# EAGLE board plate (EAGLE 9.6.2), part 1 of 6
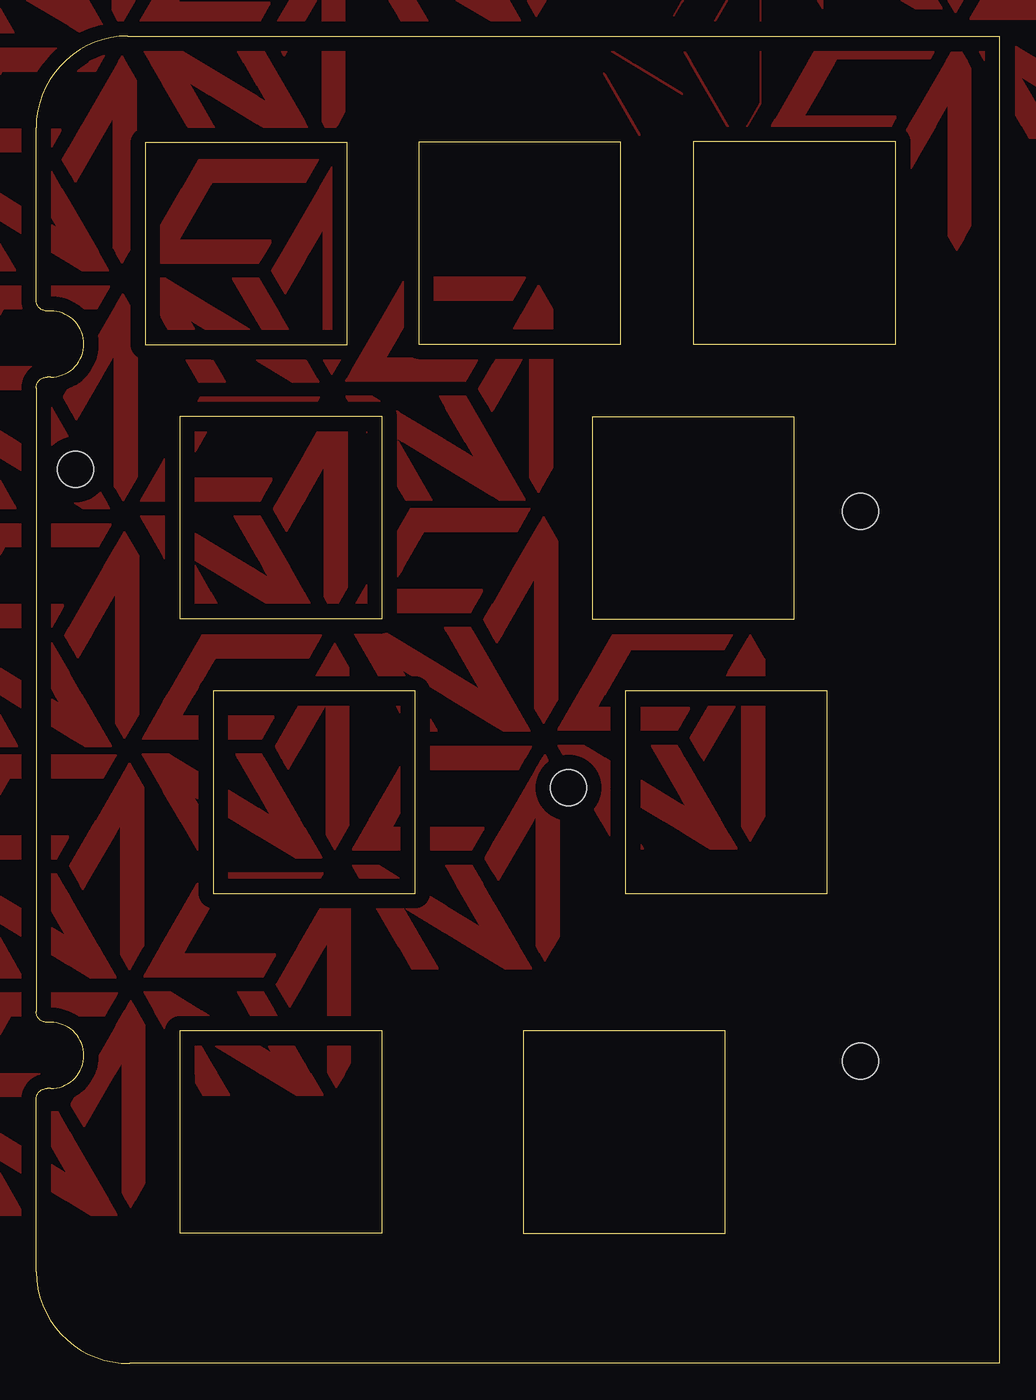
[diagram p0: board, top side]
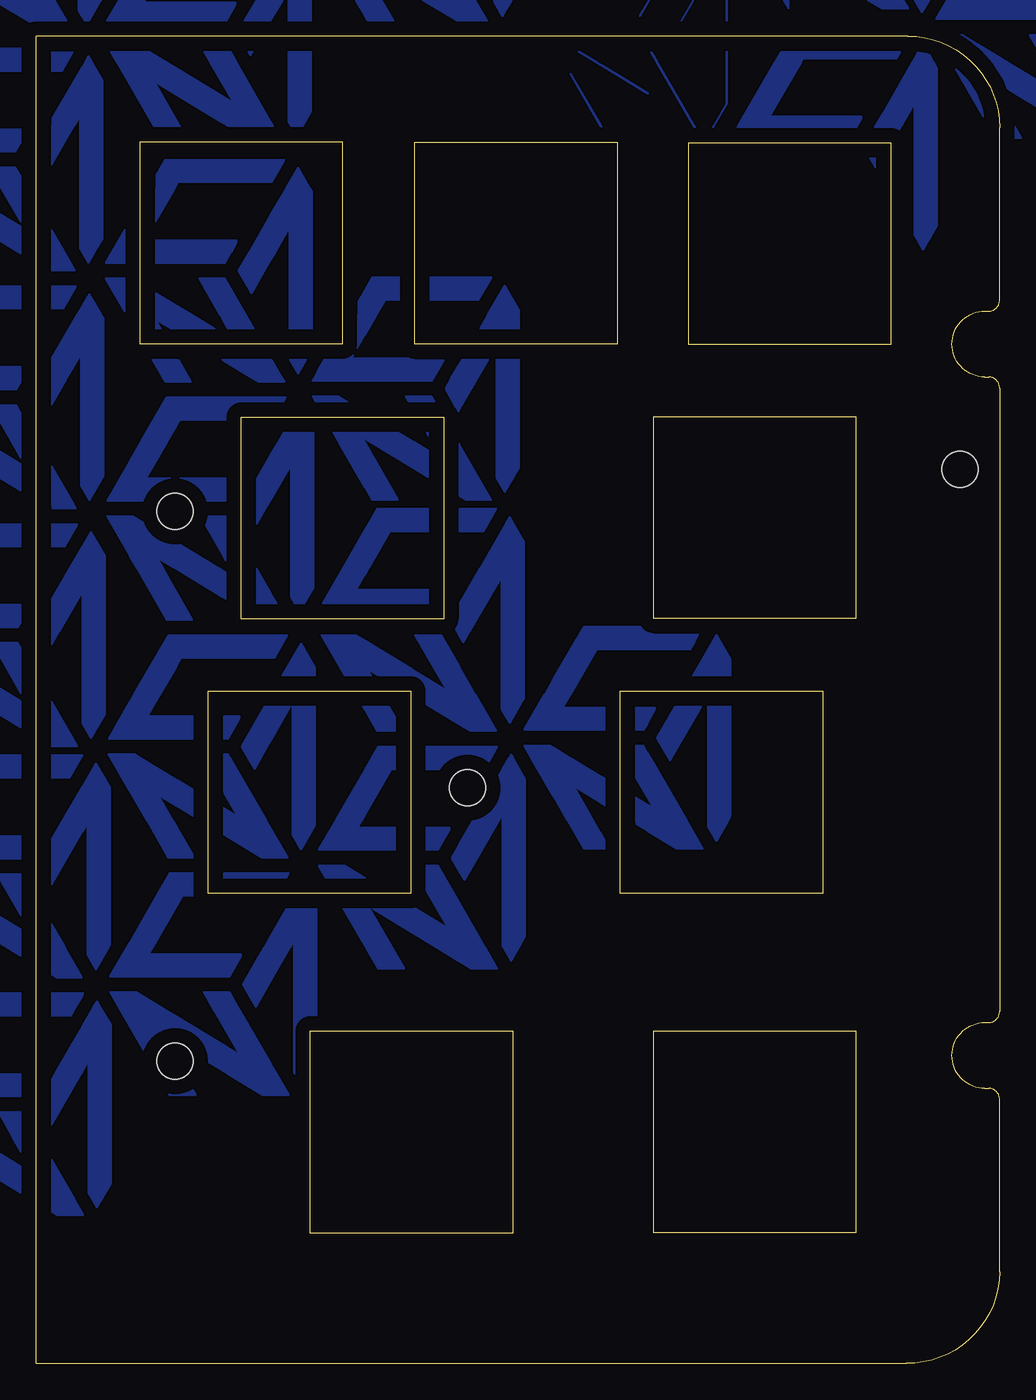
[diagram p1: board, bottom side, seen from below]

Size 66.73 x 91.95 mm. Coordinates in mm from the lower left corner, seen from the top.
Outline: 6.35,91.95 arc90 0,85.6 0,73.66 arc90 0.76,72.9 1.02,72.9 arc-90 3.3,70.61 arc-90 1.02,68.33 0.76,68.33 arc90 0,67.56 0,24.38 arc90 0.76,23.62 1.02,23.62 arc-90 3.3,21.34 arc-90 1.02,19.05 0.76,19.05 arc90 0,18.29 0,6.35 arc90 6.48,0 66.73,0 66.73,91.95 6.35,91.95
Outline: 7.54,84.57 7.54,70.57 21.54,70.57 21.54,84.57 7.54,84.57
Outline: 26.49,84.59 26.49,70.59 40.49,70.59 40.49,84.59 26.49,84.59
Outline: 45.52,84.62 45.52,70.62 59.52,70.62 59.52,84.62 45.52,84.62
Outline: 9.96,65.59 9.96,51.59 23.96,51.59 23.96,65.59 9.96,65.59
Outline: 38.51,65.57 38.51,51.57 52.51,51.57 52.51,65.57 38.51,65.57
Outline: 12.27,46.57 12.27,32.57 26.27,32.57 26.27,46.57 12.27,46.57
Outline: 40.79,46.57 40.79,32.57 54.79,32.57 54.79,46.57 40.79,46.57
Outline: 9.96,23.05 9.96,9.05 23.96,9.05 23.96,23.05 9.96,23.05
Outline: 33.73,23.02 33.73,9.02 47.73,9.02 47.73,23.02 33.73,23.02
Copper layers (1*16): Top 0.035mm / dielectric 1.5mm / Bottom 0.035mm
Design rules "default": minimum track width 6mil, minimum drill 0.35mm, track to track 6mil, track to pad 6mil, pad to pad 6mil, via to via 6mil, smd to smd 6mil, copper to edge 40mil, drill to drill 6mil, minimum pad ring 10mil, minimum via ring 8mil, stop-mask expansion 4mil, vias tented up to drill 0mil, thermal gap 10mil
Holes 2.5 mm at 36.86,39.88 57.1,59.03 57.1,20.93 2.74,61.95

## Placement (x,y rotation side)

## Tracks (layer width: path | path; a pad name or v marks a point on that pad's centre or on a via)
GND
  pour Top (rank 3): 63.67,107.92 63.52,107.66 63.52,107.64 63.81,107.64 63.81,107.66
  pour Top (rank 3): 77.39,19.73 77.29,19.89 77.29,19.89 77.29,19.74 77.31,19.73
  pour Top (rank 3): 77.39,35.15 77.31,35.15 77.29,35.14 77.29,34.98 77.29,34.98
  pour Top (rank 3): 77.73,3.71 77.3,4.47 77.29,4.48 77.29,3.71 77.31,3.71
  pour Top (rank 3): 77.74,19.12 77.31,19.12 77.29,19.12 77.29,18.35 77.3,18.36
  pour Top (rank 3): 77.29,1.72 77.82,2.65 77.8,2.65 77.29,2.65 77.29,2.63
  pour Top (rank 3): 64.65,106.21 64.25,106.9 64.24,106.9 64.24,103.28 64.26,103.26 64.63,103.26 64.65,103.27
  pour Top (rank 3): 63.51,107.64 60.99,103.28 60.99,103.26 62.8,103.26 62.82,103.28 63.06,103.7 63.07,103.71 63.07,103.28 63.08,103.26 64.23,103.26 64.24,103.27 64.24,106.9 64.24,106.92 63.83,107.64 63.8,107.64
  pour Top (rank 3): 62.81,103.26 61,103.26 60.98,103.25 60.98,100.1
  pour Top (rank 3): 60.14,99.68 60.43,99.17 60.44,99.17 60.98,100.09 60.98,100.12 60.98,103.24 60.98,103.26 59.52,100.74
  pour Top (rank 3): 64.24,103.26 63.07,103.26 63.07,103.24 63.07,98.9 63.08,98.89 64.23,98.89 64.24,98.9
  pour Top (rank 3): 64.65,103.26 64.25,103.26 64.24,103.25 64.24,98.9 64.26,98.89 64.63,98.89 64.65,98.89
  pour Top (rank 3): 63.67,93.58 64.2,94.5 64.18,94.51 63.14,94.51 63.13,94.5 63.65,93.59
  pour Top (rank 3): 60.98,103.26 60.98,103.27 60.98,103.27
  pour Top (rank 3): 64.65,95.28 64.65,98.88 64.63,98.89 64.26,98.89 64.24,98.87 64.24,94.58 64.25,94.59
  pour Top (rank 3): 63.13,94.51 64.19,94.51 64.21,94.52 64.24,94.56 64.24,94.59 64.24,98.88 64.22,98.89 63.07,98.89 63.07,98.86 63.07,94.62 63.07,94.6
  pour Top (rank 3): 64.24,77.95 64.74,78.8 64.74,78.83 64.74,81.36 64.72,81.37 64.26,81.37 64.24,81.36
  pour Top (rank 3): 63.15,81.37 63.15,78.14 63.16,78.12 63.75,77.1 63.77,77.12 64.23,77.93 64.24,77.95 64.24,81.36 64.22,81.37
  pour Top (rank 3): 64.24,85.75 63.18,85.75 63.15,85.74 63.15,81.37 64.22,81.37 64.24,81.37
  pour Top (rank 3): 62.29,85.75 60.98,85.75 60.98,83.48
  pour Top (rank 3): 60.23,83.21 60.52,82.7 60.53,82.7 60.97,83.46 60.98,83.48 60.98,85.73 60.98,85.75 60.47,85.75 60.45,85.73 59.61,84.27
  pour Top (rank 3): 60.98,86.65 60.48,85.77 60.47,85.75 60.97,85.75 60.98,85.76
  pour Top (rank 3): 60.98,85.75 62.29,85.75 62.3,85.77 63.14,87.22 63.15,87.23 63.15,85.77 63.16,85.75 64.23,85.75 64.24,85.76 64.24,90.11 64.24,90.13 63.01,90.13 62.99,90.12 60.99,86.65 60.98,86.63
  pour Top (rank 3): 64.24,81.37 64.72,81.37 64.74,81.38 64.74,85.75 64.26,85.75 64.24,85.74
  pour Top (rank 3): 64.51,90.13 64.25,90.59 64.24,90.57 64.24,90.15 64.25,90.13
  pour Top (rank 3): 64.24,85.75 64.72,85.75 64.74,85.76 64.74,89.71 64.74,89.74 64.52,90.11 64.51,90.13 64.24,90.12
  pour Top (rank 3): 64.24,90.59 63.76,91.42 63.75,91.44 63,90.14 63,90.13 64.23,90.13 64.24,90.14
  pour Top (rank 3): 54.46,91.82 53.49,90.14 53.49,90.13 54.45,90.13 54.46,90.14
  pour Top (rank 3): 55.31,90.13 55.45,90.38 55.47,90.4 57.71,90.4 57.72,90.41 57.72,91.96 57.72,91.98 54.57,91.98 54.55,91.98 54.47,91.84 54.46,91.81 54.46,90.13 54.48,90.13
  pour Top (rank 3): 51.2,85.75 54.45,85.75 54.46,85.77 54.46,86.38 54.44,86.38 53.16,86.38 53.15,86.4 54.46,88.66 54.46,90.12 54.44,90.13 53.5,90.13 53.48,90.12 51.21,86.2 51.2,86.17
  pour Top (rank 3): 51.22,84.8 54.44,84.8 54.46,84.81 54.46,85.74 54.44,85.75 51.22,85.75 51.2,85.74 51.2,84.81
  pour Top (rank 3): 51.2,84.8 51.2,85.73 51.19,85.75 50.95,85.75 50.41,84.8 50.43,84.8
  pour Top (rank 3): 54.49,84.8 57.71,84.8 57.72,84.81 57.72,85.74 57.7,85.75 54.48,85.75 54.46,85.73 54.46,84.8
  pour Top (rank 3): 60.98,91.98 57.73,91.98 57.72,91.96 57.72,90.41 57.74,90.4 60.97,90.4 60.98,90.4
  pour Top (rank 3): 57.72,84.8 58.68,84.8 58.7,84.81 59.24,85.73 59.23,85.75 57.74,85.75 57.72,85.73
  pour Top (rank 3): 59.24,85.75 59.51,86.21 59.52,86.23 59.52,86.37 59.51,86.38 57.72,86.38 57.72,86.36 57.72,85.75
  pour Top (rank 3): 57.72,86.38 54.46,86.38 54.46,86.36 54.46,85.75 57.72,85.75 57.72,85.77
  pour Top (rank 3): 54.46,90.13 54.46,88.68 54.46,88.66 55.3,90.12 55.29,90.13
  pour Top (rank 3): 51.2,86.18 50.96,85.76 50.96,85.75 51.18,85.75 51.2,85.75
  pour Top (rank 3): 61.93,90.4 62.83,91.97 62.83,91.98 60.99,91.98 60.98,91.96 60.98,90.41 60.99,90.4
  pour Top (rank 3): 69.64,90.13 67.52,91.41 67.5,91.4 67.5,90.13
  pour Top (rank 3): 66.46,92.05 64.65,92.05 64.64,92.04 65.73,90.15 65.75,90.13 67.48,90.13 67.5,90.13 67.5,91.41 67.49,91.43 66.48,92.03
  pour Top (rank 3): 67.5,87.08 68.26,85.76 68.28,85.75 70.1,85.75 70.09,85.77 68.12,89.18 68.12,89.19 70.76,87.59 70.76,89.43 70.75,89.45 69.66,90.11 69.63,90.13 67.52,90.13 67.5,90.12
  pour Top (rank 3): 70.76,89.44 70.76,87.6 70.78,87.58 73.79,85.76 73.81,85.75 74,85.75 74.03,85.75 74.03,90.13 72.24,90.13 72.22,90.12 73.59,87.74 73.6,87.73
  pour Top (rank 3): 67.5,90.13 65.77,90.13 65.75,90.12 67.49,87.1 67.5,87.08
  pour Top (rank 3): 74.03,85.75 76.56,85.75 76.55,85.77 74.04,90.11 74.03,90.12
  pour Top (rank 3): 74.03,90.13 74.03,90.13 74.03,90.14
  pour Top (rank 3): 73.04,91.86 72.93,92.04 72.91,92.05 71.12,92.05 71.11,92.04 72.21,90.13 72.24,90.13 74.02,90.13 74.02,90.15
  pour Top (rank 3): 74.03,85.62 75.23,84.88 75.25,84.87 77.07,84.87 76.56,85.75 74.03,85.75 74.03,85.72
  pour Top (rank 3): 68.78,84.87 70.59,84.87 70.6,84.88 70.11,85.73 70.09,85.75 68.27,85.75 68.29,85.72
  pour Top (rank 3): 73.81,85.75 74.02,85.62 74.03,85.64 74.03,85.74 74,85.75
  pour Top (rank 3): 67.5,94.51 70.76,94.51 70.76,94.53 70.76,94.69 67.51,94.69 67.5,94.67
  pour Top (rank 3): 73.73,94.51 73.75,94.53 73.75,94.69 70.79,94.69 70.76,94.69 70.76,94.53 70.77,94.51
  pour Top (rank 3): 64.65,93.11 67.5,93.11 67.5,93.13 67.5,94.49 67.49,94.51 65.47,94.51 65.44,94.5 64.64,93.12
  pour Top (rank 3): 67.5,94.91 69.69,98.7 69.71,98.7 70.75,98.7 70.76,98.72 70.76,98.88 70.75,98.89 67.98,98.89 67.96,98.87 67.51,98.08 67.5,98.06
  pour Top (rank 3): 74.03,98.7 76.15,98.7 76.17,98.72 76.26,98.88 74.03,98.89 74.03,98.86
  pour Top (rank 3): 76.26,98.89 77.06,100.27 77.06,100.29 74.04,100.29 74.03,100.28 74.03,98.89 74.05,98.89
  pour Top (rank 3): 67.5,93.11 70.75,93.11 70.76,93.12 70.76,94.51 67.52,94.51 67.5,94.49
  pour Top (rank 3): 70.76,100.29 68.79,100.29 68.77,100.27 67.98,98.91 67.97,98.89 70.75,98.89 70.76,98.9
  pour Top (rank 3): 70.76,98.89 74.01,98.89 74.03,98.9 74.03,100.29 70.78,100.29 70.76,100.27
  pour Top (rank 3): 70.76,93.11 72.9,93.11 72.93,93.11 73.73,94.5 73.72,94.51 70.78,94.51 70.76,94.49
  pour Top (rank 3): 67.5,94.69 67.4,94.69 67.38,94.69 67.5,94.9 67.5,94.93 67.5,98.07 67.49,98.06 65.45,94.52 65.45,94.51 67.5,94.51 67.5,94.53
  pour Top (rank 3): 70.76,98.7 74.02,98.7 74.03,98.72 74.03,98.89 70.77,98.89 70.76,98.86
  pour Top (rank 3): -2.16,76.99 -3.91,80.01 -3.9,80.02 -0.99,78.25 -0.97,78.25 -0.97,80.09 -0.99,80.11 -3.07,81.36 -3.09,81.37 -4.21,81.37 -4.23,81.36 -4.23,77.41 -4.22,77.39 -4,77 -3.98,76.99
  pour Top (rank 3): 1.01,82.68 0.9,82.87 0.88,82.87 -0.91,82.87 -0.92,82.86 -0.06,81.39 -0.05,81.37 1.77,81.37 1.76,81.39
  pour Top (rank 3): 1.1,76.99 2.28,76.27 2.29,76.29 2.29,76.98 2.27,76.99
  pour Top (rank 3): 2.29,76.99 2.29,80.45 2.28,80.48 1.77,81.36 1.75,81.37 -0.03,81.37 -0.05,81.36 1.57,78.56 1.57,78.56 -0.97,80.09 -0.97,80.07 -0.97,78.26 -0.96,78.24 1.09,76.99 1.12,76.99
  pour Top (rank 3): -3.08,81.37 -4.22,82.06 -4.23,82.05 -4.23,81.39 -4.23,81.37
  pour Top (rank 3): -7.39,82.87 -6.52,81.37 -6.5,81.37 -4.26,81.37 -4.23,81.37 -4.23,82.06 -4.25,82.08 -5.55,82.87 -5.58,82.87
  pour Top (rank 3): -6.52,81.37 -4.24,77.42 -4.23,77.41 -4.23,81.36 -4.25,81.37
  pour Top (rank 3): -3.25,75.69 -1.43,75.69 -1.42,75.71 -2.16,76.98 -2.18,76.99 -3.99,76.99 -3.98,76.97
  pour Top (rank 3): 3.22,75.69 5.03,75.69 5.03,75.71 4.3,76.98 4.28,76.99 2.31,76.99 2.29,76.98 2.29,76.29 2.29,76.26 3.2,75.71
  pour Top (rank 3): 2.29,80.47 2.29,77 2.31,76.99 4.28,76.99 4.29,77
  pour Top (rank 3): 6.94,85.75 6.94,88.87 6.22,90.11 6.2,90.13 5.7,90.13 5.55,89.87 5.55,85.77 5.56,85.75
  pour Top (rank 3): 5.96,90.57 5.7,90.13 5.71,90.13 6.19,90.13 6.21,90.13
  pour Top (rank 3): 2.43,82.34 2.72,81.83 2.74,81.83 4.99,85.73 4.99,85.75 3.17,85.75 3.16,85.72 2.29,84.22 2.29,82.59 2.3,82.57
  pour Top (rank 3): 5.96,76.23 6.38,76.97 6.39,76.99 5.56,76.99 5.55,76.97 5.55,76.94 5.56,76.92 5.94,76.25
  pour Top (rank 3): 6.94,85.75 5.56,85.75 5.55,85.73 5.55,81.38 5.56,81.37 6.92,81.37 6.94,81.37
  pour Top (rank 3): 6.94,81.37 5.56,81.37 5.55,81.35 5.55,77 5.56,76.99 6.39,76.99 6.4,77.01 6.94,77.93 6.94,77.96
  pour Top (rank 3): 1.81,83.4 2.28,82.59 2.29,82.59 2.29,84.21 2.28,84.21
  pour Top (rank 3): 5.55,85.75 5.36,85.75 5.36,85.73 5.36,81.38 5.37,81.37 5.53,81.37 5.55,81.38
  pour Top (rank 3): 5.52,76.99 5.54,76.94 5.55,76.94 5.55,76.97 5.54,76.99
  pour Top (rank 3): 5.55,81.37 5.36,81.37 5.36,81.35 5.36,77.27 5.37,77.25 5.51,76.99 5.54,76.99 5.55,77
  pour Top (rank 3): 5.55,89.87 3.18,85.77 3.17,85.75 4.98,85.75 5,85.76 5.35,86.36 5.36,86.36 5.36,85.77 5.36,85.75 5.55,85.75 5.55,85.77
  pour Top (rank 3): 2.29,90.13 -0.96,90.13 -0.97,90.11 -0.97,89.53 2.28,89.53 2.29,89.54
  pour Top (rank 3): -0.95,83.93 0.89,83.93 0.91,83.94 1.72,85.35 1.72,85.51 -0.97,85.51 -0.97,83.94
  pour Top (rank 3): -6.34,85.75 -7.38,83.95 -7.38,83.93 -4.24,83.93 -4.23,83.95 -4.23,85.5 -4.24,85.51 -4.64,85.51 -4.64,85.53 -4.52,85.74 -4.53,85.75
  pour Top (rank 3): -4.23,86.24 -4.23,89.38 -4.24,89.4 -6.34,85.75 -6.32,85.75 -4.53,85.75 -4.51,85.75
  pour Top (rank 3): -0.99,91.11 -3.24,91.11 -3.25,91.1 -3.8,90.15 -3.81,90.13 -0.98,90.13 -0.97,90.14 -0.97,91.1
  pour Top (rank 3): 2.29,91.11 -0.97,91.11 -0.97,91.09 -0.97,90.13 2.29,90.13 2.29,90.15
  pour Top (rank 3): -0.97,85.51 -4.23,85.51 -4.23,85.49 -4.23,83.94 -4.22,83.93 -0.99,83.93 -0.97,83.94
  pour Top (rank 3): 4.48,90.13 2.29,90.13 2.29,90.1 2.29,89.55 2.3,89.53 4.1,89.53 4.13,89.53
  pour Top (rank 3): -2.33,89.53 -0.98,89.53 -0.97,89.55 -0.97,90.11 -0.98,90.13 -3.8,90.13 -3.82,90.11 -4.22,89.42 -4.23,89.4 -4.23,86.25 -4.23,86.25
  pour Top (rank 3): 5.04,91.11 2.3,91.11 2.29,91.09 2.29,90.13 2.31,90.13 4.47,90.13 4.49,90.14
  pour Top (rank 3): 2.29,96.76 2.29,94.52 2.3,94.51 3.58,94.51 3.58,94.52
  pour Top (rank 3): -1.02,99.35 -0.98,99.28 -0.97,99.26 -0.97,99.35 -1,99.35
  pour Top (rank 3): -7.49,99.35 -7.23,98.89 -4.9,98.89 -5.65,99.34 -5.68,99.35
  pour Top (rank 3): -0.73,94.51 2.28,92.68 2.29,92.7 2.29,94.48 2.28,94.51
  pour Top (rank 3): -4.23,98.48 -4.89,98.88 -4.92,98.89 -7.21,98.89 -7.22,98.88 -4.7,94.52 -4.68,94.51 -4.25,94.51 -4.23,94.51
  pour Top (rank 3): -3.12,92.17 -1.52,92.17 -2.87,94.51 -4.23,94.51 -4.23,94.48 -4.23,93.71 -4.22,93.68 -3.35,92.18 -3.33,92.17
  pour Top (rank 3): -0.73,94.51 2.29,94.51 2.29,94.53 2.29,96.74 2.29,96.77 1.07,98.87 1.05,98.89 -0.74,98.89 -0.75,98.88 1.46,95.04 1.47,95.03 -0.95,96.49 -0.97,96.5 -0.97,94.66 -0.96,94.64
  pour Top (rank 3): 1.06,98.89 0.8,99.35 -0.96,99.35 -0.97,99.33 -0.97,99.28 -0.97,99.25 -0.77,98.9 -0.75,98.89
  pour Top (rank 3): -4.7,94.51 -4.24,93.72 -4.23,93.71 -4.23,94.49 -4.24,94.51
  pour Top (rank 3): -0.97,94.65 -0.97,96.49 -0.99,96.51 -4.23,98.48 -4.23,98.46 -4.23,94.51 -4.21,94.51 -2.88,94.51 -2.88,94.52 -4.01,96.49 -4.01,96.49
  pour Top (rank 3): 3.12,92.17 4.94,92.17 4.93,92.19 3.6,94.5 3.57,94.51 2.29,94.51 2.29,92.69 2.3,92.67 3.1,92.19
  pour Top (rank 3): 5.55,98.89 6.83,98.89 6.84,98.9 6.84,103.25 6.83,103.26 5.57,103.26 5.55,103.26
  pour Top (rank 3): 5.85,92.71 5.87,92.73 6.83,94.39 6.84,94.42 6.84,94.5 6.82,94.51 5.57,94.51 5.55,94.5 5.55,93.24 5.56,93.22
  pour Top (rank 3): 5.55,93.23 5.55,94.51 5.26,94.51 5.26,93.74
  pour Top (rank 3): 6.84,103.26 6.84,105.32 6.84,105.34 5.86,107.03 5.85,107.04 5.56,106.53 5.55,106.51 5.55,103.28 5.56,103.26
  pour Top (rank 3): 2.33,98.81 2.62,98.3 2.63,98.3 2.97,98.88 2.95,98.89 2.31,98.89 2.29,98.88 2.3,98.86
  pour Top (rank 3): 2.28,98.89 2.29,98.88 2.29,98.88
  pour Top (rank 3): 2.29,98.89 2.96,98.89 2.98,98.9 5.24,102.82 5.26,102.84 5.26,98.89 5.27,98.89 5.54,98.89 5.55,98.9 5.55,103.25 5.54,103.26 3.67,103.26 2.3,100.88 2.29,100.86
  pour Top (rank 3): 5.55,106.52 3.67,103.27 3.69,103.26 5.53,103.26 5.55,103.27
  pour Top (rank 3): 6.84,98.89 5.56,98.89 5.55,98.87 5.55,94.52 5.56,94.51 6.82,94.51 6.84,94.51
  pour Top (rank 3): 2.29,100.87 1.72,99.88 1.72,99.86 2.28,98.89 2.29,98.9
  pour Top (rank 3): 5.55,98.89 5.26,98.88 5.26,94.51 5.55,94.51
  pour Top (rank 3): 10.45,85.75 11.19,84.47 11.21,84.46 12.06,84.46 12.07,84.48 12.07,85.73 12.06,85.75
  pour Top (rank 3): 8.81,91.64 7.07,91.64 7.05,91.64 7.92,90.13 7.95,90.13 8.8,90.13 8.81,90.14
  pour Top (rank 3): 16.22,90.13 15.35,91.63 15.33,91.64 15.33,90.15 15.34,90.13
  pour Top (rank 3): 15.33,91.64 13.54,91.64 13.53,91.64 14.39,90.13 14.42,90.13 15.32,90.13 15.33,90.14
  pour Top (rank 3): 15.33,90.13 14.4,90.13 14.41,90.1 15.33,88.51 15.33,88.53
  pour Top (rank 3): 11.38,90.13 8.89,91.63 8.87,91.64 8.81,91.64 8.81,91.62 8.81,90.15 8.82,90.13
  pour Top (rank 3): 15.33,87.73 12.07,89.71 12.07,87.87 12.08,87.85 15.32,85.89 15.33,85.89
  pour Top (rank 3): 12.07,85.75 12.07,86.09 12.07,86.12 10.54,88.77 10.53,88.78 12.06,87.86 12.07,87.87 12.07,89.68 12.07,89.71 11.38,90.12 11.36,90.13 8.83,90.13 8.81,90.11 8.81,88.59 10.45,85.75 10.47,85.75
  pour Top (rank 3): 8.81,90.13 7.93,90.13 7.94,90.11 8.8,88.61 8.81,88.61
  pour Top (rank 3): 18.59,84.46 19.47,84.46 19.48,84.47 18.75,85.74 18.72,85.75 18.61,85.75 18.59,85.74
  pour Top (rank 3): 17.67,84.46 18.57,84.46 18.59,84.47 18.59,85.75 15.56,85.75 15.57,85.73 17.65,84.48
  pour Top (rank 3): 18.74,85.75 18.6,86 18.59,85.99 18.59,85.75 18.61,85.75
  pour Top (rank 3): 15.33,88.51 16.01,87.33 16.01,87.32 15.35,87.72 15.33,87.72 15.33,85.88 15.35,85.87 15.54,85.76 15.56,85.75 18.57,85.75 18.59,85.75 18.59,85.99 18.59,86.02 16.22,90.13 15.34,90.13 15.33,90.1
  pour Top (rank 3): 12.07,86.11 12.07,85.77 12.07,85.75 12.26,85.75 12.28,85.75
  pour Top (rank 3): 12.28,85.75 12.07,85.75 12.07,84.47 12.09,84.46 13.02,84.46 13.02,84.48
  pour Top (rank 3): 18.59,94.51 18.59,96.21 17.61,94.51
  pour Top (rank 3): 20.4,99.34 20.14,98.9 20.14,98.89 20.65,98.89 20.65,98.9
  pour Top (rank 3): 16.26,92.17 17.16,90.6 17.18,90.59 18.59,93.04 18.59,94.48 18.59,94.51 17.63,94.51 17.61,94.5
  pour Top (rank 3): 20.4,85 20.83,85.74 20.81,85.75 19.98,85.75 19.97,85.74 20.39,85.02
  pour Top (rank 3): 21.39,94.51 19.81,94.51 19.8,94.49 19.8,90.14 19.82,90.13 21.36,90.13 21.39,90.13
  pour Top (rank 3): 19.44,94.51 18.61,94.51 18.59,94.5 18.59,93.06 18.6,93.05
  pour Top (rank 3): 19.96,85.75 20.82,85.75 20.84,85.76 21.38,86.7 21.39,86.73 21.39,90.11 21.37,90.13 19.8,90.13 19.8,86.05 19.8,86.02
  pour Top (rank 3): 19.8,98.3 18.6,96.23 18.59,96.2 18.59,94.52 18.6,94.51 19.43,94.51 19.45,94.52 19.79,95.12 19.8,95.12 19.8,94.51 19.82,94.51 21.37,94.51 21.39,94.52 21.39,97.61 21.38,97.63 20.66,98.88 20.64,98.89 20.16,98.89 20.13,98.88
  pour Top (rank 3): 15.45,92.89 16.16,94.11 16.17,94.14 16.17,94.27 16.15,94.28 15.35,94.28 15.33,94.27 15.33,92.7 15.35,92.71
  pour Top (rank 3): 8.83,92.7 12.06,92.7 12.07,92.71 12.07,94.26 12.07,94.28 9.8,94.28 9.8,94.3 9.92,94.51 8.83,94.51 8.81,94.5 8.81,92.71
  pour Top (rank 3): 18.92,98.89 19.49,99.88 18.61,99.88 18.59,99.87 18.59,98.91 18.6,98.89
  pour Top (rank 3): 18.57,98.29 18.59,98.31 18.59,98.34 18.59,98.87 18.58,98.89 15.36,98.89 15.33,98.88 15.33,98.3 15.35,98.29
  pour Top (rank 3): 18.59,99.88 15.34,99.88 15.33,99.86 15.33,98.9 15.35,98.89 18.57,98.89 18.59,98.89
  pour Top (rank 3): 12.07,99.88 11.22,99.88 11.19,99.87 10.63,98.9 10.63,98.89 12.05,98.89 12.07,98.89
  pour Top (rank 3): 12.08,92.7 15.33,92.7 15.33,94.27 15.31,94.28 12.08,94.28 12.07,94.27 12.07,92.72
  pour Top (rank 3): 8.81,92.7 8.81,94.48 8.81,94.51 8.11,94.51 8.09,94.5 7.05,92.7
  pour Top (rank 3): 18.59,98.32 18.92,98.88 18.89,98.89 18.6,98.89 18.59,98.86
  pour Top (rank 3): 15.33,98.89 15.33,99.87 15.31,99.88 12.08,99.88 12.07,99.86 12.07,98.9 12.08,98.89
  pour Top (rank 3): 8.81,94.51 9.9,94.51 9.93,94.51 12.06,98.21 12.07,98.23 12.07,98.87 12.06,98.89 10.64,98.89 10.62,98.88 8.82,95.76 8.81,95.73
  pour Top (rank 3): 8.81,95.74 8.11,94.52 8.11,94.51 8.8,94.51 8.81,94.52
  pour Top (rank 3): 15.33,98.29 15.33,98.88 15.31,98.89 12.09,98.89 12.07,98.87 12.07,98.23 12.08,98.24 12.11,98.29 12.13,98.29
  pour Top (rank 3): 28.38,96.76 25.11,98.73 25.11,96.89 25.13,96.87 28.36,94.91 28.38,94.92
  pour Top (rank 3): 25.43,92.77 27.24,92.77 27.25,92.77 26.25,94.51 25.13,94.51 25.11,94.5 25.11,93.32 25.12,93.3
  pour Top (rank 3): 31.64,94.51 29.05,94.51 29.04,94.5 31.62,92.94 31.64,92.93
  pour Top (rank 3): 21.94,98.8 24.41,94.53 24.42,94.51 25.09,94.51 25.11,94.51 25.11,96.46 25.11,96.48 24.76,97.08 24.77,97.09 25.11,96.88 25.11,96.9 25.11,98.71 25.11,98.73 24.86,98.88 21.9,98.89 21.9,98.87
  pour Top (rank 3): 28.36,98.89 28.37,98.87 28.38,98.88
  pour Top (rank 3): 28.38,98.86 30.24,95.63 30.23,95.63 28.39,96.75 28.38,96.74 28.38,94.9 29.01,94.52 29.04,94.51 31.62,94.51 31.64,94.52 31.64,96.36 31.63,96.38 30.19,98.88 30.17,98.89 28.38,98.89
  pour Top (rank 3): 25.11,94.51 24.42,94.51 25.11,93.31
  pour Top (rank 3): 31.64,96.37 31.64,94.53 31.64,94.51 32.7,94.51 32.7,94.52
  pour Top (rank 3): 24.86,98.89 23.12,99.94 23.1,99.95 21.87,99.95 21.85,99.94 21.85,98.95 21.88,98.91 21.9,98.89
  pour Top (rank 3): 31.89,92.77 31.91,92.77 33.7,92.77 33.71,92.77 32.71,94.5 32.69,94.51 31.65,94.51 31.64,94.49 31.64,92.95 31.64,92.93
  pour Top (rank 3): 28.38,99.95 27.76,99.95 27.76,99.93 28.35,98.9 28.37,98.89 28.38,98.91
  pour Top (rank 3): 30.18,98.89 29.58,99.93 29.57,99.95 28.39,99.95 28.38,99.94 28.38,98.89 28.39,98.89
  pour Top (rank 3): 21.28,99.95 21.85,98.96 21.85,98.98 21.85,99.93 21.84,99.95
  pour Top (rank 3): 25.11,96.47 25.11,94.53 25.12,94.51 26.23,94.51 26.25,94.51
  pour Top (rank 3): 34.9,98.89 34.04,98.89 34.03,98.87 34.03,94.52 34.04,94.51 34.9,94.51
  pour Top (rank 3): 35.32,94.51 35.6,94.99 35.61,95.01 35.61,98.88 34.92,98.89 34.9,98.88 34.9,94.51
  pour Top (rank 3): 34.63,107.64 32.11,103.28 32.11,103.26 33.92,103.26 33.94,103.28 34.03,103.44 34.03,103.28 34.04,103.26 34.9,103.26 34.9,103.29 34.9,107.16 34.89,107.18
  pour Top (rank 3): 30.49,100.47 31.39,98.9 31.41,98.9 31.63,99.29 31.64,99.32 31.64,102.44 31.63,102.46
  pour Top (rank 3): 31.64,99.29 33.92,103.24 33.93,103.26 32.11,103.26 32.09,103.25 31.64,102.47 31.64,102.44
  pour Top (rank 3): 34.9,103.26 34.04,103.26 34.03,103.25 34.03,98.9 34.04,98.89 34.9,98.89
  pour Top (rank 3): 35.61,103.26 34.92,103.26 34.9,103.26 34.9,98.89 35.59,98.89 35.61,98.89
  pour Top (rank 3): 35.61,105.94 34.91,107.16 34.9,107.17 34.9,103.29 34.9,103.26 35.59,103.26 35.61,103.27
  pour Top (rank 3): 34.62,93.3 34.64,93.32 34.89,93.76 34.9,93.79 34.9,94.48 34.89,94.51 34.03,94.51 34.03,94.48 34.03,94.35 34.04,94.32
  pour Top (rank 3): 35.32,94.51 34.9,94.51 34.9,94.48 34.9,93.79 34.9,93.77
  pour Top (rank 3): -3.07,42.75 -1.26,42.75 -1.27,42.77 -3.32,46.32 -3.34,46.33 -4.22,46.33 -4.23,46.32 -4.23,44.74 -4.22,44.72 -3.09,42.76
  pour Top (rank 3): 3.39,42.75 5.2,42.75 5.2,42.76 3.14,46.32 3.13,46.33 2.3,46.33 2.29,46.31 2.29,43.43 2.3,43.41 3.37,42.76
  pour Top (rank 3): -0.97,47.24 -0.97,46.34 -0.95,46.33 0.51,46.33 0.53,46.33
  pour Top (rank 3): 2.29,47.8 2.29,46.36 2.29,46.33 3.12,46.33 3.13,46.34
  pour Top (rank 3): 2.29,46.33 1.33,46.33 1.32,46.32 1.74,45.6 0.53,46.33 -0.96,46.33 -0.97,46.31 -0.97,45.41 -0.96,45.39 2.27,43.42 2.29,43.43
  pour Top (rank 3): -3.32,46.33 -3.75,47.07 -3.73,47.06 -2.53,46.33 -0.98,46.33 -0.97,46.35 -0.97,47.23 -0.98,47.25 -4.22,49.21 -4.23,49.21 -4.23,46.36 -4.23,46.33
  pour Top (rank 3): -5.15,46.33 -4.24,44.76 -4.23,44.74 -4.23,46.32 -4.24,46.33
  pour Top (rank 3): 1.17,49.73 1.07,49.92 1.05,49.92 -0.74,49.92 -0.75,49.91 1.32,46.33 2.28,46.33 2.29,46.35 2.29,47.79 2.28,47.81
  pour Top (rank 3): -2.53,46.33 -0.98,45.39 -0.97,45.41 -0.97,46.31 -0.98,46.33
  pour Top (rank 3): -4.23,49.22 -5.4,49.92 -5.42,49.92 -7.21,49.92 -7.22,49.92 -5.16,46.34 -5.13,46.33 -4.25,46.33 -4.23,46.34
  pour Top (rank 3): 6.12,43.28 7.11,44.99 7.11,46.32 7.09,46.33 5.57,46.33 5.55,46.32 5.55,44.27 5.56,44.25 6.1,43.3
  pour Top (rank 3): 7.11,55.91 6.12,57.62 5.56,56.65 5.55,56.63 5.55,55.11 5.56,55.09 7.1,55.09 7.11,55.11
  pour Top (rank 3): 5.52,46.33 5.52,44.33 5.53,44.3 5.54,44.28 5.55,44.27 5.55,46.31 5.55,46.33
  pour Top (rank 3): 7.11,55.09 5.56,55.09 5.55,55.07 5.55,50.72 5.56,50.71 7.08,50.71 7.11,50.72
  pour Top (rank 3): 5.52,46.33 5.55,46.33 5.55,46.36 5.55,50.7 5.54,50.71 5.52,50.7
  pour Top (rank 3): 3.96,50.71 5.52,53.41 5.52,53.4 5.52,50.73 5.53,50.71 5.55,50.71 5.55,55.09 5.53,55.09 4.67,55.09 4.65,55.08 2.29,50.99 2.29,50.72 2.3,50.71
  pour Top (rank 3): 2.59,49.39 2.88,48.88 2.9,48.88 3.95,50.7 3.95,50.71 2.3,50.71 2.29,50.69 2.29,49.92 2.3,49.89
  pour Top (rank 3): 5.52,56.59 4.66,55.09 4.68,55.09 5.53,55.09 5.55,55.1 5.55,56.62 5.55,56.64
  pour Top (rank 3): 7.11,50.71 5.56,50.71 5.55,50.69 5.55,46.34 5.56,46.33 7.08,46.33 7.11,46.34
  pour Top (rank 3): 2.29,50.99 2.13,50.72 2.15,50.71 2.28,50.71 2.29,50.73
  pour Top (rank 3): 2.13,50.71 1.98,50.46 1.99,50.44 2.28,49.93 2.29,49.92 2.29,50.69 2.29,50.71
  pour Top (rank 3): -3.03,55.09 -2.18,56.57 -2.15,56.58 -0.98,56.58 -0.97,56.59 -0.97,58.14 -0.98,58.16 -3.08,58.16 -4.23,56.18 -4.23,56.15 -4.23,55.11 -4.23,55.09
  pour Top (rank 3): -4.23,55.09 -4.23,53.01 -4.22,53.02 -3.04,55.07 -3.03,55.09
  pour Top (rank 3): -4.49,52.57 -4.23,53 -4.23,55.08 -4.25,55.09 -4.84,55.09 -4.86,55.08 -7.22,51 -7.22,50.98 -4.23,50.98 -4.23,52.55 -4.25,52.57
  pour Top (rank 3): -0.97,52.57 -4.23,52.57 -4.23,52.54 -4.23,50.99 -4.22,50.98 -0.99,50.98 -0.97,50.99
  pour Top (rank 3): 0.84,50.98 1.05,50.98 1.07,50.99 1.88,52.4 1.89,52.43 1.89,52.56 1.86,52.56 -0.96,52.56 -0.97,52.55 -0.97,50.98
  pour Top (rank 3): 5.21,58.16 2.31,58.16 2.29,58.15 2.29,56.58 2.31,56.58 4.29,56.58 4.3,56.59
  pour Top (rank 3): -4.23,56.17 -4.84,55.11 -4.85,55.09 -4.24,55.09 -4.23,55.11
  pour Top (rank 3): 2.29,58.16 -0.97,58.16 -0.97,58.14 -0.97,56.59 -0.96,56.58 2.27,56.58 2.29,56.59
  pour Top (rank 3): -5.86,63.85 -4.24,61.05 -4.23,61.04 -4.23,63.85 -4.26,63.85
  pour Top (rank 3): -1.5,59.47 -3.84,63.53 -3.85,63.54 -0.97,61.81 -0.97,61.83 -0.97,63.64 -0.98,63.66 -1.28,63.84 -1.3,63.85 -4.23,63.85 -4.23,61.05 -4.23,61.02 -3.33,59.48 -3.31,59.47
  pour Top (rank 3): 2.29,63.85 0.64,63.85 0.62,63.85 1.63,62.09 1.63,62.08 -0.95,63.64 -0.97,63.65 -0.97,61.81 -0.96,61.79 2.28,59.83 2.29,59.85
  pour Top (rank 3): 4.96,59.47 2.44,63.83 2.43,63.85 2.29,63.85 2.29,63.83 2.29,59.83 2.88,59.47
  pour Top (rank 3): 2.29,64.1 2.29,63.85 2.31,63.85 2.42,63.85 2.43,63.86
  pour Top (rank 3): -1.29,63.85 -4.21,65.62 -4.23,65.63 -4.23,63.87 -4.22,63.85
  pour Top (rank 3): -4.23,65.63 -5.49,66.39 -5.51,66.4 -7.33,66.4 -7.32,66.38 -5.86,63.86 -5.84,63.85 -4.24,63.85 -4.23,63.87
  pour Top (rank 3): -3.18,59.22 -1.37,59.22 -1.36,59.23 -1.49,59.46 -1.51,59.47 -3.32,59.47 -3.32,59.45
  pour Top (rank 3): 3.28,59.23 3.3,59.22 5.09,59.22 5.1,59.23 4.97,59.46 4.95,59.47 2.9,59.47 2.89,59.46
  pour Top (rank 3): 1.07,66.21 0.97,66.39 0.94,66.4 -0.84,66.4 -0.86,66.39 0.61,63.86 0.63,63.85 2.28,63.85 2.29,63.87 2.29,64.08 2.28,64.11
  pour Top (rank 3): 5.42,63.85 5.42,60.79 5.54,60.58 5.55,60.57 5.55,63.85 5.53,63.85
  pour Top (rank 3): 5.55,73.29 5.17,72.62 5.17,72.61 5.54,72.61 5.55,72.63
  pour Top (rank 3): 5.42,63.85 5.53,63.85 5.55,63.85 5.55,68.23 5.44,68.23 5.42,68.23
  pour Top (rank 3): 6.88,72.61 6.02,74.09 6.01,74.09 5.56,73.3 5.55,73.28 5.55,72.61 5.57,72.61
  pour Top (rank 3): 5.55,72.61 5.18,72.61 5.15,72.6 2.63,68.24 2.64,68.23 4.46,68.23 4.47,68.25 5.42,69.89 5.42,69.88 5.42,68.25 5.42,68.23 5.53,68.23 5.55,68.24
  pour Top (rank 3): 1.88,66.93 2.29,66.21 2.29,67.64
  pour Top (rank 3): 7,72.39 6.88,72.6 6.86,72.61 5.56,72.61 5.55,72.59 5.55,68.24 5.56,68.23 7,68.23
  pour Top (rank 3): 5.55,60.56 6,59.78 6.02,59.76 6.99,61.44 7,61.47 7,63.84 6.98,63.85 5.57,63.85 5.55,63.84
  pour Top (rank 3): 5.55,63.85 6.99,63.85 7,63.86 7,68.23 5.57,68.23 5.55,68.22
  pour Top (rank 3): 2.49,65.86 2.78,65.35 2.8,65.35 4.45,68.22 4.44,68.23 2.65,68.23 2.63,68.23 2.29,67.65 2.29,67.62 2.29,66.21
  pour Top (rank 3): 5.11,74.63 2.31,74.63 2.29,74.63 2.29,73.05 2.31,73.05 4.18,73.05 4.2,73.06
  pour Top (rank 3): -0.97,68.23 -4.22,68.23 -4.23,68.21 -4.23,67.47 -4.22,67.46 -0.97,67.46
  pour Top (rank 3): -6.88,68.23 -7.32,67.47 -7.32,67.46 -4.25,67.46 -4.23,67.47 -4.23,68.21 -4.24,68.23
  pour Top (rank 3): -2.53,72.61 -2.27,73.05 -2.25,73.05 -0.97,73.05 -0.97,74.62 -0.99,74.63 -3.17,74.63 -3.19,74.62 -4.23,72.82 -4.23,72.61 -4.21,72.61
  pour Top (rank 3): -4.23,69.04 -4.58,69.04 -4.58,69.05 -4.23,69.65 -4.23,72.59 -4.24,72.61 -4.34,72.61 -4.36,72.59 -6.88,68.23 -6.86,68.23 -4.25,68.23 -4.23,68.24
  pour Top (rank 3): -4.35,72.61 -4.25,72.61 -4.23,72.62 -4.23,72.8 -4.24,72.81
  pour Top (rank 3): -4.23,69.04 -4.23,68.24 -4.22,68.23 -0.98,68.23 -0.97,68.24 -0.97,69.02 -0.97,69.04
  pour Top (rank 3): -0.97,67.46 0.95,67.46 0.97,67.47 1.4,68.21 1.4,68.23 -0.97,68.23
  pour Top (rank 3): 1.78,68.88 1.78,69.04 -0.96,69.04 -0.97,69.02 -0.97,68.25 -0.96,68.23 1.39,68.23 1.41,68.23
  pour Top (rank 3): -4.23,72.61 -4.23,69.67 -4.23,69.67 -2.53,72.6 -2.55,72.61
  pour Top (rank 3): 2.29,74.63 -0.97,74.63 -0.97,74.61 -0.97,73.06 -0.96,73.05 2.27,73.05 2.29,73.06
  pour Top (rank 3): 11.13,68.23 11.27,68 11.28,67.98 12.06,67.98 12.07,68 12.07,68.21 12.06,68.23
  pour Top (rank 3): 12.07,73.28 12.07,72.61 12.1,72.61 13.16,72.61 13.16,72.61
  pour Top (rank 3): 15.33,69.45 15.33,71.29 15.32,71.31 13.18,72.61 13.15,72.61 12.09,72.61 12.07,72.6 12.07,71.42
  pour Top (rank 3): 12.07,69.77 10.61,72.31 10.62,72.3 12.06,71.43 12.07,71.44 12.07,72.58 12.07,72.61 8.82,72.61 8.81,72.59 8.81,72.27 8.82,72.24 11.12,68.25 11.14,68.23 12.07,68.23 12.07,68.25
  pour Top (rank 3): 12.96,68.23 12.08,68.23 12.07,68.21 12.07,68 12.08,67.98 13.09,67.98 13.1,68
  pour Top (rank 3): 17.35,68.23 17.74,67.99 17.76,67.98 18.59,67.98 18.59,68 18.59,68.22 18.58,68.23
  pour Top (rank 3): 12.07,68.23 12.95,68.23 12.95,68.24 12.07,69.77 12.07,69.75
  pour Top (rank 3): 18.59,68.23 18.59,69.64 18.59,69.67 16.9,72.6 16.88,72.61 15.36,72.61 15.33,72.61 15.33,72.18 15.34,72.15 16.09,70.84 15.34,71.3 15.33,71.29 15.33,69.47 15.33,69.45 17.34,68.23 17.37,68.23
  pour Top (rank 3): 12.07,72.61 12.07,73.28 8.97,75.16 8.94,75.16 8.81,75.16 8.81,72.63 8.82,72.61
  pour Top (rank 3): 8.81,75.16 7.13,75.16 8.6,72.62 8.62,72.61 8.8,72.61 8.81,72.63
  pour Top (rank 3): 8.81,72.61 8.63,72.61 8.61,72.6 8.8,72.26 8.81,72.27
  pour Top (rank 3): 19.42,68.23 18.59,68.23 18.59,67.99 18.62,67.98 19.55,67.98 19.56,68
  pour Top (rank 3): 18.59,69.67 18.59,68.25 18.6,68.23 19.4,68.23 19.42,68.23
  pour Top (rank 3): 15.33,75.16 13.6,75.16 15.07,72.62 15.09,72.61 15.33,72.61 15.33,72.63
  pour Top (rank 3): 15.33,72.61 15.09,72.61 15.08,72.6 15.33,72.17 15.33,72.18
  pour Top (rank 3): 16.89,72.61 15.43,75.15 15.41,75.16 15.35,75.16 15.33,75.16 15.33,72.62 15.35,72.61
  pour Top (rank 3): 18.59,76.99 18.91,76.99 19.87,78.65 19.88,78.64 19.88,76.99 19.9,76.99 21.45,76.99 21.46,77 21.46,81.14 21.46,81.16 21.35,81.35 21.34,81.37 19.63,81.37 19.61,81.36 18.59,79.6
  pour Top (rank 3): 16.95,74.63 17.24,74.12 17.25,74.12 18.59,76.42 18.59,76.45 18.59,76.98 18.57,76.99 17.1,76.99 17.08,76.98 16.34,75.69
  pour Top (rank 3): 18.91,76.99 18.59,76.99 18.59,76.96 18.59,76.46 18.59,76.44
  pour Top (rank 3): 20.48,82.86 19.62,81.38 19.62,81.37 21.33,81.37 21.33,81.38
  pour Top (rank 3): 20.47,68.52 20.49,68.54 21.46,70.23 21.46,72.6 21.45,72.61 19.9,72.61 19.88,72.6 19.88,69.56 19.89,69.54
  pour Top (rank 3): 18.59,79.6 17.09,76.99 17.1,76.99 18.57,76.99 18.59,76.99
  pour Top (rank 3): 21.46,76.99 19.89,76.99 19.88,76.97 19.88,72.62 19.89,72.61 21.44,72.61 21.46,72.61
  pour Top (rank 3): 15.33,81.82 18.59,81.82 18.59,81.84 18.59,83.39 18.58,83.4 15.35,83.4 15.33,83.39
  pour Top (rank 3): 18.65,81.82 19.56,83.38 19.56,83.4 18.6,83.4 18.59,83.38 18.59,81.84 18.6,81.82
  pour Top (rank 3): 12.07,76.22 12.07,76.97 12.07,76.99 8.81,76.99 8.81,76.24 8.82,76.22
  pour Top (rank 3): 7.57,76.99 7.13,76.23 7.15,76.22 8.8,76.22 8.81,76.23 8.81,76.98 8.8,76.99
  pour Top (rank 3): 15.53,76.41 15.85,76.97 15.86,76.99 15.35,76.99 15.33,76.98 15.33,76.23 15.35,76.22 15.4,76.22 15.42,76.23
  pour Top (rank 3): 8.81,79.13 7.57,76.99 8.8,76.99 8.81,77
  pour Top (rank 3): 16.24,77.64 16.24,77.8 15.33,77.8 15.33,77.78 15.33,77.01 15.34,76.99 15.85,76.99 15.87,77
  pour Top (rank 3): 9.87,77.8 11.93,81.36 11.91,81.37 10.12,81.37 10.1,81.36 8.82,79.14 8.81,79.12 8.81,77.01 8.82,76.99 12.05,76.99 12.07,76.99 12.07,77.79 12.06,77.8
  pour Top (rank 3): 15.33,77.8 12.08,77.8 12.07,77.79 12.07,76.99 15.32,76.99 15.33,77
  pour Top (rank 3): 12.07,76.22 15.33,76.22 15.33,76.24 15.33,76.96 15.33,76.99 12.08,76.99 12.07,76.96 12.07,76.24
  pour Top (rank 3): 12.07,81.62 12.07,83.38 12.07,83.4 11.29,83.4 11.27,83.39 10.11,81.38 10.11,81.37 11.92,81.37 11.94,81.39
  pour Top (rank 3): 12.19,81.82 15.31,81.82 15.33,81.82 15.33,83.39 15.31,83.4 12.09,83.4 12.07,83.39 12.07,81.63 12.08,81.63
  pour Top (rank 3): 11.12,55.09 10.7,55.83 10.7,55.83 11.91,55.1 11.94,55.09 12.07,55.09 12.07,56.85 12.05,56.87 9.04,58.69 8.83,58.69 8.81,58.68 8.81,55.93 8.82,55.91 9.29,55.1 9.31,55.09
  pour Top (rank 3): 15.31,58.69 13.71,58.69 13.69,58.69 15.33,55.84 15.33,55.86 15.33,58.69
  pour Top (rank 3): 18.59,53.34 18.59,51.53 18.6,51.51 19.64,51.51 19.64,51.52
  pour Top (rank 3): 11.93,55.09 12.06,55.01 12.07,55.02 12.07,55.07 12.06,55.09
  pour Top (rank 3): 17.58,55.09 15.52,58.67 15.5,58.69 15.34,58.69 15.33,58.68 15.33,55.85 15.34,55.82 15.75,55.11 15.77,55.09
  pour Top (rank 3): 11.12,55.09 9.31,55.09 9.3,55.08 11.35,51.53 11.37,51.51 12.06,51.51 12.07,51.53 12.07,53.45
  pour Top (rank 3): 13.19,51.51 12.08,53.43 12.07,53.44 12.07,51.52 12.09,51.51
  pour Top (rank 3): 12.07,56.86 12.07,55.09 12.09,55.09 14.98,55.09 14.97,55.1
  pour Top (rank 3): 7.22,58.69 8.8,55.94 8.81,55.94 8.81,58.69 8.79,58.69
  pour Top (rank 3): 17.83,51.51 18.58,51.51 18.59,51.52 18.59,53.34 18.58,53.36 17.58,55.09 15.77,55.09 15.78,55.07 16.18,54.38 16.17,54.37 15.35,54.87 15.33,54.88 15.33,53.04 15.35,53.02 17.81,51.53
  pour Top (rank 3): 15.33,53.03 15.33,54.87 15.32,54.89 15,55.08 14.98,55.09 12.09,55.09 12.07,55.09 12.07,55.01 12.09,54.99
  pour Top (rank 3): 19.97,55.09 21.54,55.09 21.55,55.11 21.55,59.46 21.54,59.47 19.99,59.47 19.97,59.47
  pour Top (rank 3): 19.97,62.19 19.97,59.49 19.97,59.47 21.54,59.47 21.55,59.49 21.55,63.83 21.54,63.85 19.11,63.85 19.09,63.84 18.6,62.98 18.59,62.96 18.59,59.81
  pour Top (rank 3): 19.97,53.08 20.55,52.06 20.57,52.06 21.54,53.75 21.55,53.77 21.55,55.08 21.53,55.09 19.98,55.09 19.97,55.08
  pour Top (rank 3): 16.42,59.22 17.33,57.65 17.34,57.64 18.39,59.46 18.38,59.47 16.57,59.47 16.55,59.45
  pour Top (rank 3): 18.59,62.98 16.58,59.49 16.57,59.47 18.38,59.47 18.4,59.48 18.59,59.8 18.59,59.83
  pour Top (rank 3): 20.56,66.39 19.97,65.37 19.1,63.85 21.53,63.85 21.55,63.85 21.55,64.68
  pour Top (rank 3): 19.65,66.93 18.61,66.93 18.59,66.92 18.59,65.34 18.73,65.34 18.74,65.35
  pour Top (rank 3): 15.62,59.94 16.33,61.16 16.33,61.19 16.33,61.32 16.31,61.33 15.35,61.33 15.33,61.32 15.33,59.75 15.36,59.75 15.49,59.75 15.51,59.76
  pour Top (rank 3): 12.07,66.93 11.38,66.93 11.36,66.92 9.59,63.87 9.59,63.85 11.41,63.85 11.42,63.87 12.06,64.98 12.07,65
  pour Top (rank 3): 18.59,66.93 15.34,66.93 15.33,66.9 15.33,65.36 15.35,65.34 18.58,65.34 18.59,65.35
  pour Top (rank 3): 12.07,59.75 12.07,61.32 12.06,61.33 9.97,61.33 9.96,61.34 11.4,63.83 11.4,63.85 9.59,63.85 9.57,63.83 8.81,62.51 8.81,62.49 8.81,59.77 8.82,59.75
  pour Top (rank 3): 12.08,59.75 15.31,59.75 15.33,59.75 15.33,61.33 15.31,61.33 12.08,61.33 12.07,61.31 12.07,59.77
  pour Top (rank 3): 12.27,65.34 15.31,65.34 15.33,65.35 15.33,66.92 15.31,66.93 12.08,66.93 12.07,66.91 12.07,65.02 12.07,65
  pour Top (rank 3): 7.22,59.75 8.79,59.75 8.81,59.75 8.81,62.5 8.8,62.5
  pour Top (rank 3): 25.41,63.85 28.37,62.06 28.38,62.07 28.38,63.83 28.37,63.85
  pour Top (rank 3): 28.38,63.85 28.45,63.85 28.46,63.85 28.39,63.89 28.38,63.9
  pour Top (rank 3): 25.09,63.85 23.28,63.85 23.27,63.84 25.11,60.65 25.11,60.65 25.11,63.8 25.1,63.83
  pour Top (rank 3): 32.06,59.82 33.87,59.82 33.87,59.83 31.64,63.69 31.64,63.69 31.64,60.09 31.65,60.07 32.04,59.83
  pour Top (rank 3): 21.99,66.04 23.26,63.85 23.29,63.85 25.07,63.85 25.09,63.86 24.93,64.13 24.93,64.14 25.11,64.03 25.11,64.05 25.11,65.86 25.11,65.88 23.28,66.99 23.26,67 21.87,67 21.85,66.99 21.85,66.3 21.86,66.27
  pour Top (rank 3): 25.6,59.82 27.42,59.82 27.41,59.84 25.11,63.81 25.11,60.66 25.12,60.64 25.58,59.83
  pour Top (rank 3): 29.73,63.85 31.55,63.85 31.54,63.87 29.74,66.99 29.72,67 28.39,67 28.38,66.98 28.38,66.21 28.38,66.18
  pour Top (rank 3): 27.91,67 28.37,66.21 28.38,66.21 28.38,66.98 28.37,67
  pour Top (rank 3): 28.38,63.85 28.38,63.9 28.35,63.92 25.12,65.88 25.11,65.86 25.11,64.05 25.12,64.02 25.39,63.86 25.42,63.85
  pour Top (rank 3): 30.41,62.67 28.47,63.85 28.44,63.85 28.39,63.85 28.38,63.84 28.38,62.08 28.38,62.05 31.62,60.09 31.64,60.09 31.64,63.69 31.63,63.71 31.56,63.83 31.55,63.85 29.73,63.85 29.74,63.83
  pour Top (rank 3): 21.44,67 21.84,66.31 21.85,66.29 21.85,66.98 21.84,67
  pour Top (rank 3): 35.78,72.61 35.78,72.98 35.77,73 34.9,74.5 34.9,74.5 34.9,72.63 34.9,72.61
  pour Top (rank 3): 34.9,68.23 34.2,68.23 34.19,68.21 34.19,63.86 34.21,63.85 34.87,63.85 34.9,63.85
  pour Top (rank 3): 31.64,68.23 32.86,68.23 32.89,68.23 34.18,70.47 34.19,70.49 34.19,68.25 34.2,68.23 34.9,68.23 34.9,72.6 34.87,72.61 33.59,72.61 33.58,72.59 31.64,69.24 31.64,69.22
  pour Top (rank 3): 34.9,74.51 34.8,74.67 34.79,74.69 33.59,72.62 33.6,72.61 34.88,72.61 34.9,72.62
  pour Top (rank 3): 32.89,68.23 31.66,68.23 31.64,68.23 31.64,66.07 31.65,66.08
  pour Top (rank 3): 31.26,66.46 31.56,65.95 31.57,65.95 31.62,66.04 31.64,66.07 31.64,68.2 31.63,68.23 31.07,68.23 31.05,68.22 30.65,67.52 30.66,67.5
  pour Top (rank 3): 35.78,68.23 34.9,68.23 34.9,68.2 34.9,63.86 34.91,63.85 35.76,63.85 35.78,63.86
  pour Top (rank 3): 34.79,60.36 34.8,60.37 34.9,60.54 34.9,63.84 34.88,63.85 34.22,63.85 34.19,63.84 34.19,61.39 34.2,61.37
  pour Top (rank 3): 34.9,68.23 35.78,68.23 35.78,68.25 35.78,72.59 35.76,72.61 34.91,72.61 34.9,72.6
  pour Top (rank 3): 35.78,62.06 35.78,63.82 35.78,63.85 34.92,63.85 34.9,63.85 34.9,60.54
  pour Top (rank 3): 31.64,69.23 31.06,68.24 31.07,68.23 31.63,68.23 31.64,68.25
  pour Top (rank 3): 28.38,69.64 25.12,69.64 25.11,69.62 25.11,68.23 28.37,68.23 28.38,68.25
  pour Top (rank 3): 25.12,68.05 28.37,68.05 28.38,68.08 28.38,68.21 28.37,68.23 25.12,68.23 25.11,68.2 25.11,68.07
  pour Top (rank 3): 28.38,68.05 29.74,68.05 29.83,68.21 29.83,68.23 28.39,68.23 28.38,68.21
  pour Top (rank 3): 29.84,68.23 30.56,69.48 30.56,69.61 30.56,69.64 28.39,69.64 28.38,69.63 28.38,68.24 28.39,68.23
  pour Top (rank 3): 21.85,68.76 21.55,68.23 21.57,68.23 21.83,68.23 21.85,68.23
  pour Top (rank 3): 32.97,73.65 33.87,75.22 33.87,75.23 31.66,75.23 31.64,75.22 31.64,73.65 31.66,73.65
  pour Top (rank 3): 25.11,68.05 25.11,68.21 25.1,68.23 21.85,68.23 21.85,68.07 21.86,68.05
  pour Top (rank 3): 28.38,73.65 31.63,73.65 31.64,73.67 31.64,75.22 31.62,75.23 28.39,75.23 28.38,75.22
  pour Top (rank 3): 25.11,74.41 24.08,72.61 24.1,72.61 25.11,72.61 25.11,72.63
  pour Top (rank 3): 21.55,68.23 21.45,68.07 21.45,68.05 21.83,68.05 21.85,68.05 21.85,68.22 21.84,68.23
  pour Top (rank 3): 21.85,68.23 25.11,68.23 25.11,68.25 25.11,69.64 24.21,69.64 24.19,69.64 25.11,71.23 25.11,71.26 25.11,72.59 25.1,72.61 24.09,72.61 24.07,72.6 21.85,68.76
  pour Top (rank 3): 25.9,72.61 26.5,73.65 28.37,73.65 28.38,73.67 28.38,75.21 28.37,75.23 25.6,75.23 25.58,75.21 25.13,74.43 25.11,74.41 25.11,72.62 25.13,72.61
  pour Top (rank 3): 25.11,72.61 25.11,71.25 25.12,71.26 25.9,72.6 25.89,72.61
  pour Top (rank 3): 2.29,28.81 2.29,32.36 2.29,32.38 1.82,33.19 1.79,33.19 0.01,33.19 0.01,33.18 2.09,29.58 -0.97,31.43 -0.97,31.41 -0.97,29.59 -0.96,29.57 0.29,28.81
  pour Top (rank 3): 1.52,33.71 1.42,33.89 1.39,33.9 -0.39,33.9 -0.4,33.89 0,33.2 0.02,33.19 1.8,33.19 1.81,33.2
  pour Top (rank 3): 0.29,28.81 2.27,27.61 2.29,27.61 2.29,28.81
  pour Top (rank 3): -6.47,33.19 -4.24,29.34 -4.23,29.32 -4.23,33.19 -4.26,33.19
  pour Top (rank 3): -2.11,28.81 -3.39,31.03 -3.4,31.05 -0.98,29.58 -0.97,29.59 -0.97,31.41 -0.98,31.43 -3.88,33.19 -3.9,33.19 -4.22,33.19 -4.23,33.18 -4.23,29.33 -4.23,29.31 -3.95,28.82 -3.93,28.81
  pour Top (rank 3): -2.11,28.81 -3.93,28.81 -3.94,28.8 -2.74,26.72 -2.71,26.72 -0.98,26.72 -0.97,26.74 -0.97,26.82 -0.98,26.85
  pour Top (rank 3): -0.97,26.72 -0.92,26.72 -0.91,26.73 -0.96,26.82 -0.97,26.83
  pour Top (rank 3): -3.88,33.19 -4.23,33.4 -4.23,33.38 -4.23,33.19
  pour Top (rank 3): 2.29,32.38 2.29,28.83 2.3,28.81 4.33,28.81 4.34,28.82
  pour Top (rank 3): -4.23,33.4 -5.05,33.9 -6.87,33.9 -6.87,33.89 -6.47,33.2 -6.45,33.19 -4.23,33.19 -4.23,33.22
  pour Top (rank 3): 5.55,26.72 5.55,26.73 5.55,26.73
  pour Top (rank 3): 3.74,26.72 5.55,26.72 5.54,26.74 4.36,28.8 4.34,28.81 2.29,28.81 2.29,27.61 2.3,27.6 3.72,26.74
  pour Top (rank 3): 5.55,40.01 4.15,37.59 4.15,37.57 5.54,37.57 5.55,37.59
  pour Top (rank 3): 5.87,28.29 6.46,27.28 6.47,27.26 7.36,28.81 7.34,28.81 5.88,28.81 5.87,28.8
  pour Top (rank 3): 5.55,37.57 4.16,37.57 4.14,37.57 2.34,34.45 2.33,34.43 3.03,33.2 3.05,33.19 3.43,33.19 3.45,33.2 5.54,36.83 5.55,36.85
  pour Top (rank 3): 3.24,32.84 3.44,33.19 3.04,33.19
  pour Top (rank 3): 7.45,33.19 5.88,33.19 5.87,33.18 5.87,28.83 5.88,28.81 7.34,28.81 7.37,28.82 7.45,28.96 7.45,28.98
  pour Top (rank 3): 7.45,37.57 7.45,39.89 6.47,41.6 6.46,41.58 6.28,41.28 5.55,40.01 5.55,37.59 5.56,37.57
  pour Top (rank 3): 7.45,37.57 5.56,37.57 5.55,37.56 5.55,36.86 5.55,36.85 5.86,37.38 5.87,37.39 5.87,33.2 5.89,33.19 7.43,33.19 7.45,33.2
  pour Top (rank 3): 2.29,42.14 -0.96,42.14 -0.97,42.12 -0.97,41.96 -0.96,41.95 2.29,41.95
  pour Top (rank 3): -0.97,36.54 -4.12,36.54 -4.14,36.55 -3.55,37.56 -3.56,37.57 -4.23,37.57 -4.23,37.55 -4.23,34.97 -4.21,34.96 -0.99,34.96 -0.97,34.97
  pour Top (rank 3): -0.97,34.96 1.4,34.96 1.42,34.97 2.23,36.38 2.23,36.4 2.23,36.54 2.21,36.54 -0.96,36.54 -0.97,36.53
  pour Top (rank 3): 2.29,41.95 -0.97,41.95 -0.97,41.93 -0.97,40.57 -0.96,40.55 2.27,40.55 2.29,40.56
  pour Top (rank 3): 5.55,42.13 5.53,42.14 2.31,42.14 2.29,42.13 2.29,41.97 2.29,41.95 5.44,41.95 5.46,41.96
  pour Top (rank 3): 5.55,42.14 5.55,42.13 5.55,42.13
  pour Top (rank 3): 5.45,41.95 2.31,41.95 2.29,41.94 2.29,40.56 2.31,40.55 4.63,40.55 4.65,40.57
  pour Top (rank 3): -0.99,42.14 -2.72,42.14 -2.74,42.13 -2.84,41.96 -2.83,41.95 -0.99,41.95 -0.97,41.96 -0.97,42.12
  pour Top (rank 3): -4.23,39.54 -5.37,37.58 -5.35,37.57 -4.23,37.57 -4.23,37.6
  pour Top (rank 3): -3.54,37.57 -1.82,40.55 -1.8,40.55 -0.97,40.55 -0.97,40.58 -0.97,41.94 -0.98,41.95 -2.82,41.95 -2.84,41.95 -4.23,39.55 -4.23,39.52 -4.23,37.58 -4.21,37.57
  pour Top (rank 3): -5.37,37.57 -6.88,34.96 -6.86,34.96 -4.24,34.96 -4.23,34.97 -4.23,37.56 -4.25,37.57
  pour Top (rank 3): -2.07,15.67 -4.21,16.97 -4.23,16.98 -4.23,15.7 -4.23,15.67
  pour Top (rank 3): -1.42,11.3 -3.32,14.58 -3.3,14.57 -0.99,13.17 -0.97,13.16 -0.97,15 -0.99,15.02 -2.06,15.67 -2.09,15.67 -4.22,15.67 -4.23,15.66 -4.23,13.02 -4.23,12.99 -3.26,11.31 -3.24,11.3
  pour Top (rank 3): 2.29,16.06 2.29,15.68 2.31,15.67 2.5,15.67 2.5,15.69
  pour Top (rank 3): 1.61,17.24 1.5,17.42 1.48,17.43 -0.31,17.43 -0.32,17.42 0.68,15.69 0.7,15.67 2.27,15.67 2.29,15.69 2.29,16.06
  pour Top (rank 3): -0.97,10.51 -0.97,10.27 -0.97,10.25 -0.83,10.25 -0.82,10.26
  pour Top (rank 3): 5.55,10.25 5.63,10.25 5.63,10.26 5.55,10.41 5.55,10.39
  pour Top (rank 3): 2.29,11.3 2.29,15.67 2.27,15.67 0.7,15.67 0.7,15.66 2.17,13.12 2.17,13.11 -0.96,15 -0.97,15 -0.97,13.16 -0.95,13.15 2.1,11.3 2.13,11.3
  pour Top (rank 3): -1.42,11.3 -3.24,11.3 -3.24,11.28 -2.66,10.26 -2.64,10.25 -0.98,10.25 -0.97,10.27 -0.97,10.51 -0.98,10.53
  pour Top (rank 3): -4.23,16.98 -4.96,17.43 -4.99,17.43 -6.77,17.43 -6.79,17.42 -5.79,15.69 -5.77,15.67 -4.26,15.67 -4.23,15.68
  pour Top (rank 3): 2.51,15.67 2.3,15.67 2.29,15.66 2.29,11.31 2.3,11.3 5.03,11.3 5.03,11.31
  pour Top (rank 3): 2.11,11.29 2.29,11.18 2.29,11.29 2.27,11.29
  pour Top (rank 3): 3.82,10.25 5.53,10.25 5.55,10.25 5.55,10.39 5.55,10.41 5.04,11.29 5.02,11.3 2.3,11.3 2.29,11.28 2.29,11.2 2.3,11.18 3.8,10.27
  pour Top (rank 3): -5.78,15.67 -4.24,13 -4.23,13.02 -4.23,15.65 -4.24,15.67
  pour Top (rank 3): 5.96,15.67 7.53,15.67 7.54,15.69 7.54,20.04 7.53,20.05 5.98,20.05 5.96,20.05
  pour Top (rank 3): 6.38,24.82 6.16,24.45 6.16,24.43 6.93,24.43 6.95,24.44 6.57,25.11 6.55,25.12
  pour Top (rank 3): 7.54,15.67 5.97,15.67 5.96,15.66 5.96,11.82 6.25,11.31 6.27,11.3 6.83,11.3 6.85,11.3 7.53,12.48 7.54,12.5
  pour Top (rank 3): 5.96,20.92 5.96,20.07 5.97,20.05 7.54,20.05 7.54,20.08 7.54,23.41 7.53,23.43 6.96,24.43 6.94,24.43 6.16,24.43 6.14,24.42 5.56,23.4 5.55,23.38 5.55,20.23 5.56,20.23
  pour Top (rank 3): 2.41,17.96 3.32,16.39 3.33,16.38 5.45,20.05 5.44,20.05 3.63,20.05
  pour Top (rank 3): 6.55,10.79 6.57,10.81 6.85,11.29 6.82,11.29 6.26,11.29 6.27,11.28
  pour Top (rank 3): 5.55,23.39 3.63,20.06 3.64,20.05 5.45,20.05 5.55,20.22 5.55,20.24
  pour Top (rank 3): 2.29,20.05 2.32,20.05 2.31,20.07
  pour Top (rank 3): 2.29,20.05 2.29,19.86 2.3,19.87 2.31,19.9 2.32,19.92 2.32,20.03 2.32,20.05
  pour Top (rank 3): 4.93,24.43 2.29,24.43 2.29,24.41 2.29,24.09 2.31,24.08 4.71,24.08 4.73,24.09
  pour Top (rank 3): -0.97,20.05 2.28,20.05 2.29,20.07 -0.96,20.07
  pour Top (rank 3): -0.96,18.49 1.49,18.49 1.51,18.5 2.28,19.84 2.29,19.86 2.29,20.05 2.27,20.05 -0.95,20.05 -0.97,20.05 -0.97,18.5
  pour Top (rank 3): -0.97,20.05 -4.23,20.05 -4.23,20.03 -4.23,18.49 -0.98,18.49 -0.97,18.51
  pour Top (rank 3): -5.89,20.05 -6.79,18.49 -4.23,18.49 -4.23,18.51 -4.23,20.03 -4.23,20.05
  pour Top (rank 3): 2.29,24.43 -0.96,24.43 -0.97,24.41 -0.97,24.09 -0.96,24.08 2.27,24.08 2.29,24.09
  pour Top (rank 3): -4.23,22.92 -5.88,20.06 -5.87,20.05 -4.24,20.05 -4.23,20.07
  pour Top (rank 3): -0.97,20.05 -0.98,20.07 -4.05,20.07 -1.74,24.07 -1.72,24.08 -0.98,24.08 -0.97,24.1 -0.97,24.42 -0.99,24.43 -3.33,24.43 -3.36,24.43 -4.23,22.93 -4.23,22.9 -4.23,20.08 -4.23,20.05
  pour Top (rank 3): -0.98,25.66 -2.63,25.66 -2.65,25.65 -3.35,24.45 -3.36,24.43 -0.98,24.43 -0.97,24.45 -0.97,25.65
  pour Top (rank 3): 5.55,25.5 5.55,25.66 5.53,25.66 2.3,25.66 2.29,25.65 2.29,24.45 2.3,24.43 4.91,24.43 4.94,24.44
  pour Top (rank 3): 5.55,25.66 5.55,25.51 5.56,25.52 5.64,25.66 5.63,25.66
  pour Top (rank 3): 2.29,25.66 -0.96,25.66 -0.97,25.65 -0.97,24.45 -0.96,24.43 2.27,24.43 2.29,24.44
  pour Top (rank 3): 8.81,24.43 8.2,24.43 8.19,24.42 8.81,23.36 8.81,23.37
  pour Top (rank 3): 15.33,24.43 15.33,23.29 15.33,23.26 16.4,21.41 16.38,21.42 15.33,22.06 15.33,22.03 15.33,20.22 15.34,20.2 15.57,20.06 15.59,20.05 18.58,20.05 18.59,20.07 18.59,20.76 18.58,20.78 16.48,24.43 16.45,24.43
  pour Top (rank 3): 16.48,24.43 15.73,25.73 15.71,25.73 15.34,25.73 15.33,25.71 15.33,24.43
  pour Top (rank 3): 15.33,25.73 13.92,25.73 13.91,25.72 14.65,24.45 14.66,24.43 15.33,24.43 15.33,24.45
  pour Top (rank 3): 15.33,22.06 12.07,24.03 12.07,22.19 12.08,22.17 15.32,20.21 15.33,20.22
  pour Top (rank 3): 14.66,24.43 15.32,23.28 15.33,23.27 15.33,24.42 15.32,24.43
  pour Top (rank 3): 18.59,18.56 19.85,18.56 19.87,18.56 19.01,20.04 18.99,20.05 18.62,20.05 18.59,20.05
  pour Top (rank 3): 11.41,24.43 9.29,25.72 9.26,25.73 8.81,25.73 8.81,24.45 8.82,24.43
  pour Top (rank 3): 12.07,20.05 12.52,20.05 12.54,20.06 12.07,20.87 12.07,20.85
  pour Top (rank 3): 8.81,25.73 7.45,25.73 7.44,25.72 8.18,24.45 8.19,24.43 8.8,24.43 8.81,24.45
  pour Top (rank 3): 15.58,20.05 18.05,18.56 18.07,18.56 18.57,18.56 18.59,18.56 18.59,20.05 18.57,20.05
  pour Top (rank 3): 18.59,20.05 18.99,20.05 19,20.07 18.6,20.76 18.59,20.75
  pour Top (rank 3): 13.41,18.56 12.56,20.03 12.54,20.05 12.09,20.05 12.07,20.04 12.07,18.58 12.08,18.56
  pour Top (rank 3): 12.07,20.87 10.91,22.88 12.07,22.18 12.07,24.02 12.06,24.04 11.42,24.43 11.4,24.43 8.81,24.43 8.81,23.37 8.82,23.34 10.71,20.06 10.73,20.05 12.06,20.05 12.07,20.07
  pour Top (rank 3): 10.72,20.05 11.57,18.57 11.59,18.56 12.07,18.56 12.07,18.58 12.07,20.05 12.05,20.05
  pour Top (rank 3): 21.77,24.43 20.19,24.43 20.19,24.42 20.19,20.15 20.19,20.12 20.21,20.07 20.23,20.05 21.32,20.05 21.34,20.06 21.76,20.78 21.77,20.8
  pour Top (rank 3): 20.78,19.09 20.8,19.11 21.33,20.04 21.33,20.05 20.24,20.05 20.23,20.04
  pour Top (rank 3): 18.59,29.64 18.13,28.83 18.12,28.81 18.57,28.81 18.59,28.82
  pour Top (rank 3): 18.12,28.81 16.65,26.28 16.65,26.25 17.55,24.68 17.56,24.69 18.59,26.47 18.59,26.49 18.59,28.81 18.57,28.81
  pour Top (rank 3): 20.19,24.43 21.76,24.43 21.77,24.45 21.77,28.8 21.76,28.81 20.21,28.81 20.19,28.81
  pour Top (rank 3): 20.64,33.19 20.91,33.19 20.91,33.21 20.79,33.42 20.78,33.43
  pour Top (rank 3): 20.92,33.19 20.65,33.19 20.64,33.18 20.6,33.11 18.6,29.65 18.59,29.62 18.59,28.82 18.61,28.81 19.94,28.81 20.18,29.23 20.19,29.21 20.19,28.83 20.19,28.81 21.76,28.81 21.77,28.83 21.77,31.71 21.76,31.74
  pour Top (rank 3): 18.59,26.47 19.94,28.8 19.93,28.81 18.6,28.81 18.59,28.79
  pour Top (rank 3): 12.07,26.79 12.07,28.36 12.05,28.37 10.19,28.37 10.19,28.39 10.43,28.81 10.41,28.81 8.81,28.81 8.81,26.81 8.82,26.79
  pour Top (rank 3): 8.6,28.81 7.44,26.81 7.44,26.79 8.8,26.79 8.81,26.81 8.81,28.81 8.79,28.81
  pour Top (rank 3): 19.87,33.97 18.59,33.97 18.59,33.2 18.62,33.19 19.41,33.19 19.43,33.21
  pour Top (rank 3): 19.42,33.19 18.6,33.19 18.59,33.17 18.59,32.4 18.61,32.39 18.96,32.39 18.97,32.41
  pour Top (rank 3): 12.07,33.19 11.14,33.19 11.12,33.17 8.81,29.18 8.81,29.15 8.81,28.83 8.82,28.81 10.42,28.81 10.44,28.83 12.07,31.65 12.07,31.67
  pour Top (rank 3): 18.59,33.19 15.34,33.19 15.33,33.17 15.33,32.4 15.35,32.39 18.57,32.39 18.59,32.39
  pour Top (rank 3): 15.33,32.39 15.33,33.19 15.31,33.19 12.08,33.19 12.07,33.18 12.07,31.66 12.49,32.37 12.5,32.39
  pour Top (rank 3): 8.81,29.17 8.61,28.83 8.61,28.81 8.8,28.81 8.81,28.83
  pour Top (rank 3): 18.59,33.97 15.34,33.97 15.33,33.95 15.33,33.21 15.35,33.19 18.57,33.19 18.59,33.2
  pour Top (rank 3): 15.33,26.79 15.33,28.37 15.31,28.37 12.08,28.37 12.07,28.36 12.07,26.81 12.08,26.79
  pour Top (rank 3): 15.33,33.19 15.33,33.97 15.31,33.97 12.08,33.97 12.07,33.96 12.07,33.21 12.08,33.19
  pour Top (rank 3): 15.73,26.79 16.54,28.2 16.55,28.22 16.55,28.35 16.54,28.37 15.35,28.37 15.33,28.36 15.33,26.79 15.35,26.79
  pour Top (rank 3): 12.07,33.97 11.59,33.97 11.57,33.95 11.14,33.21 11.14,33.19 12.05,33.19 12.07,33.19
  pour Top (rank 3): 15.77,41.95 15.63,42.21 15.6,42.21 15.33,42.21 15.33,41.97 15.34,41.95
  pour Top (rank 3): 15.33,37.57 15.33,38.45 15.33,38.48 12.09,40.44 12.07,40.44 12.07,38.6 12.09,38.58 13.76,37.57
  pour Top (rank 3): 13.76,37.57 15.33,36.62 15.33,36.64 15.33,37.55 15.33,37.57
  pour Top (rank 3): 11.84,37.57 10.03,37.57 10.02,37.57 11.47,35.05 11.48,35.03 12.07,35.03 12.07,35.05 12.07,37.15 12.07,37.18
  pour Top (rank 3): 9.58,41.95 9.17,42.2 9.15,42.21 8.83,42.21 8.81,42.2 8.81,41.96 8.83,41.95
  pour Top (rank 3): 8.81,42.21 7.34,42.21 7.34,42.19 7.48,41.96 7.5,41.95 8.8,41.95 8.81,41.97
  pour Top (rank 3): 11.84,37.57 10.81,39.35 10.82,39.35 12.06,38.6 12.07,38.6 12.07,40.44 12.05,40.46 9.59,41.95 9.56,41.95 8.81,41.95 8.81,41.93 8.81,39.66 8.82,39.64 10.01,37.58 10.03,37.57
  pour Top (rank 3): 7.48,41.95 8.8,39.67 8.81,39.66 8.81,41.95 8.79,41.95
  pour Top (rank 3): 13.31,35.03 12.07,37.17 12.07,35.04 12.08,35.03
  pour Top (rank 3): 13.95,41.95 15.32,39.58 15.33,39.57 15.33,41.95 15.31,41.95
  pour Top (rank 3): 15.33,42.21 13.81,42.21 13.81,42.19 13.95,41.96 13.97,41.95 15.32,41.95 15.33,41.97
  pour Top (rank 3): 17.95,35.03 18.59,35.03 18.59,35.05 18.59,37.06 18.59,37.08 18.31,37.57 18.28,37.57 15.35,37.57 15.33,37.56 15.33,36.63 15.35,36.61 17.93,35.05
  pour Top (rank 3): 15.77,41.95 15.35,41.95 15.33,41.94 15.33,39.57 15.34,39.54 16.29,37.9 16.3,37.89 15.34,38.47 15.33,38.45 15.33,37.57 18.29,37.57 18.29,37.59
  pour Top (rank 3): 18.59,37.07 18.59,35.04 18.61,35.03 19.75,35.03 19.76,35.04
  pour Top (rank 3): 20.08,45.7 20.08,41.97 20.09,41.95 21.67,41.95 21.67,41.98 21.67,46.32 21.65,46.33 18.63,46.33 18.61,46.32 18.6,46.3 18.59,46.28 18.59,43.13 18.6,43.14
  pour Top (rank 3): 20.08,37.57 21.66,37.57 21.67,37.59 21.67,41.94 21.65,41.95 20.11,41.95 20.08,41.95
  pour Top (rank 3): 18.59,43.12 18.59,46.27 18.59,46.29 16.55,42.75 16.54,42.73 16.98,41.97 17,41.95 17.91,41.95 17.93,41.97